# Altium PCB PCB1.PcbDoc
Units mil, origin at the board's own origin, x right, y up, seen from the top; angles counter-clockwise.
Board outline 6000 x 4000 mil, 2 copper layers (Top Layer, Bottom Layer); 18 components, 26 nets, 68 pads, 0 vias.
Unrouted connection lines stored in the file: 35.
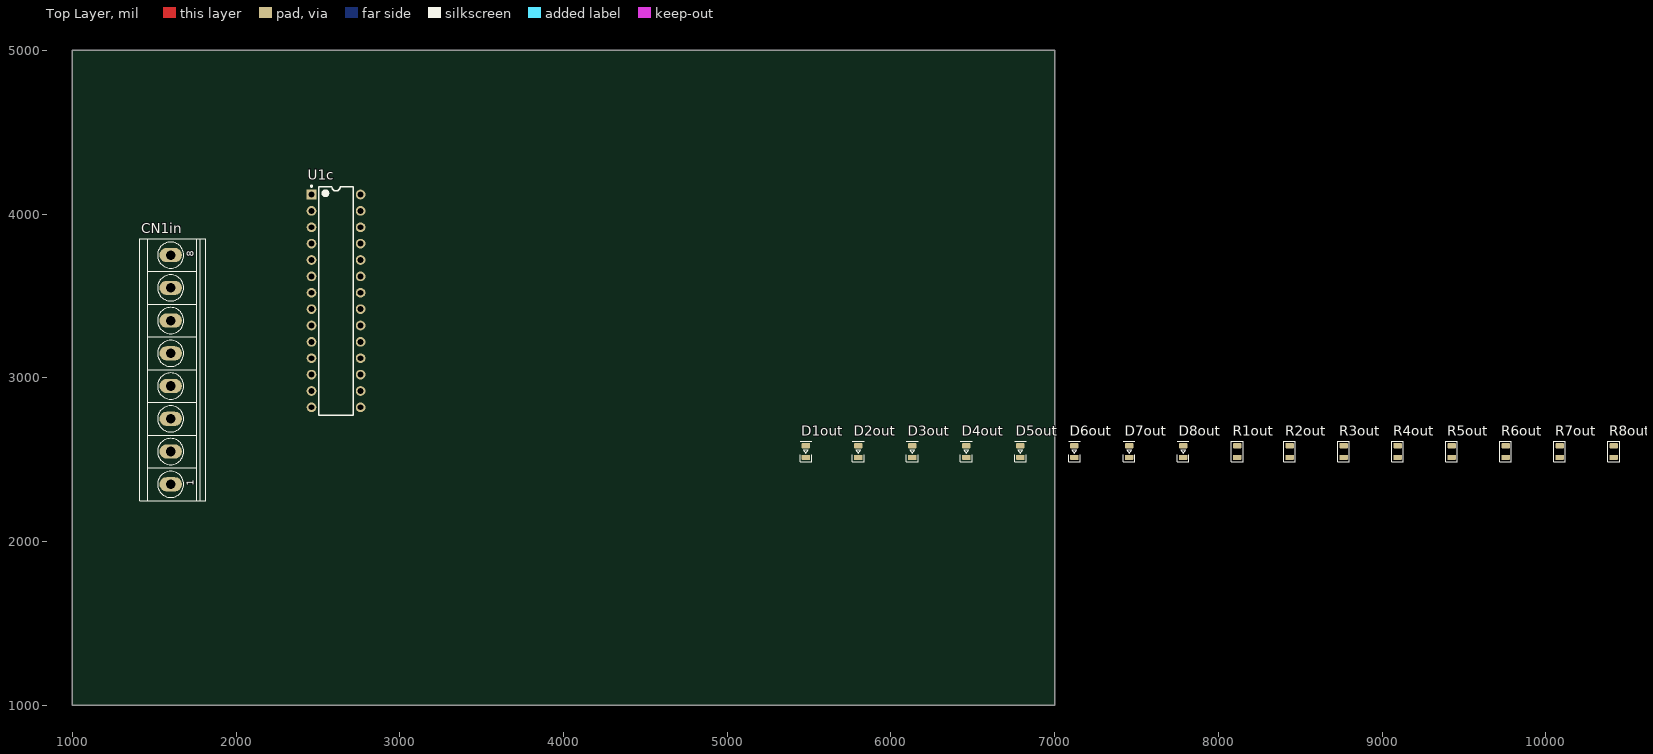
[diagram p0: Top Layer view]
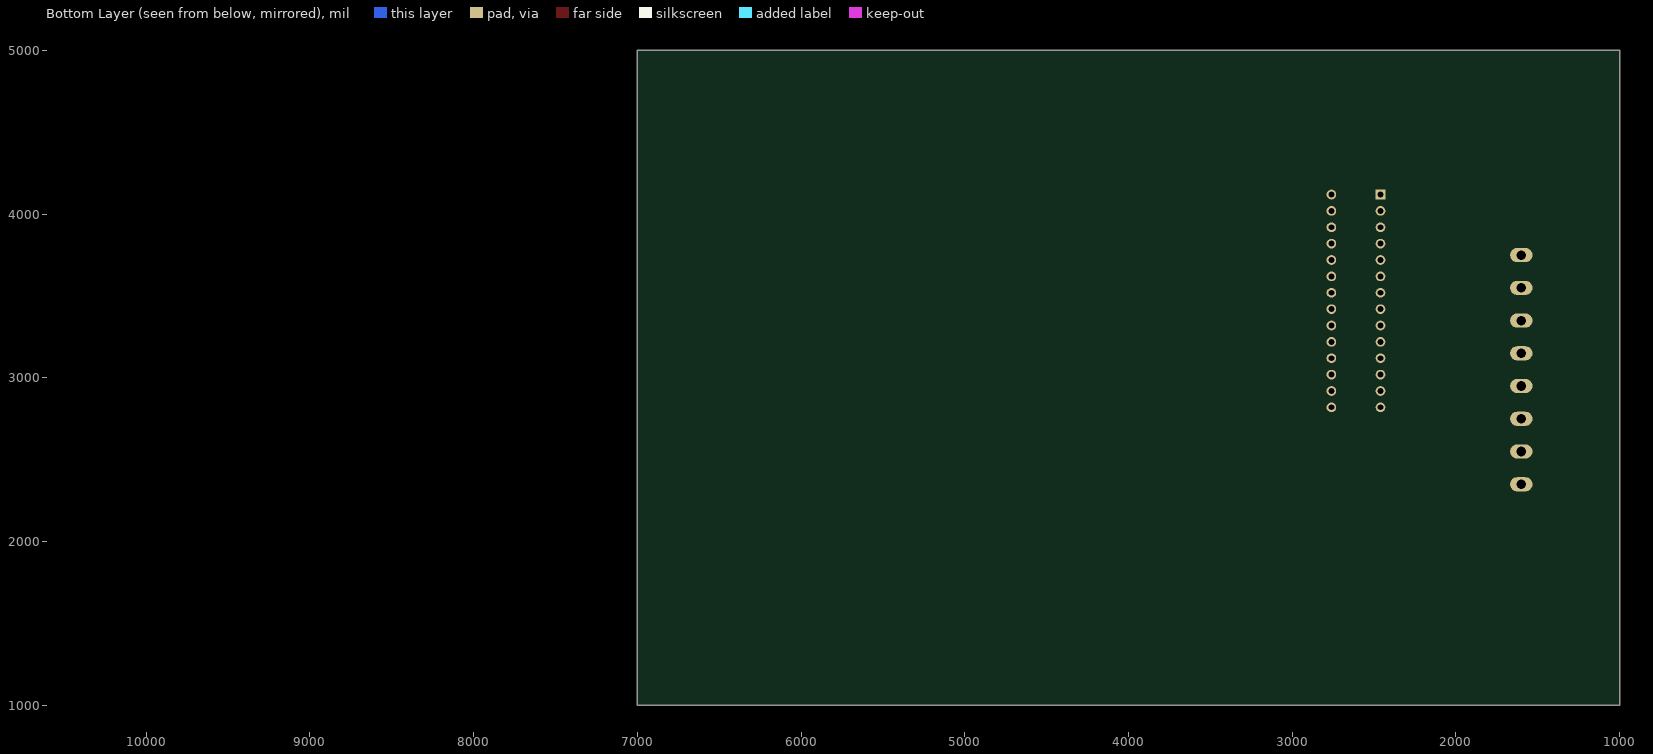
[diagram p1: Bottom Layer view, seen from below]

## Layer stack, top to bottom
Top Solder: solder mask 0.4, Solder Resist, Dk 3.5
Top Layer: signal copper 1.4
Dielectric 1: dielectric 12.6, FR-4, Dk 4.8
Bottom Layer: signal copper 1.4
Bottom Solder: solder mask 0.4, Solder Resist, Dk 3.5

## Board outline
1000,1000 7000,1000 7000,5000 1000,5000

## Design rules (kind name [scope] priority, off if disabled: settings)
Clearance [All] p1: gap=10 ignorepadtopadclearanceinfootprint=FALSE except(0: Arc-Hole Track-Hole SMDPad-Hole THPad-Hole Via-Hole Fill-Hole Poly-Hole Region-Hole Text-Hole)
PolygonConnect [All] p1: connectstyle=Relief reliefconductorwidth=10 reliefentries=4 polygonreliefangle="90 Angle" airgapwidth=10
RoomDefinition Leds [InComponentClass('Leds')] p1: confinementstyle=ConfineIn formatcopy=TRUE lockcomponents=FALSE outline 5435,845 10665,845 10665,2725 5435,2725
RoomDefinition Headers [InComponentClass('Headers')] p2: confinementstyle=ConfineIn formatcopy=TRUE lockcomponents=FALSE outline 975,2220 1825,2220 1825,4845 975,4845
RoomDefinition Avr [InComponentClass('Avr')] p3: confinementstyle=ConfineIn formatcopy=TRUE lockcomponents=FALSE outline 2420,2720 4555,2720 4555,4290 2420,4290
RoutingVias [All] p1: holewidth=28 width=50 viastyle="Through Hole" minholewidth=28 minwidth=50 maxholewidth=28 maxwidth=50
SolderMaskExpansion [All] p1: expansion=4 istentingtop=FALSE
Width [All] p1: maxlimit=10 minlimit=10 preferedwidth=10
30 further rules are at their usual default settings.

## Classes and differential pairs
component class Leds: D1out D2out D3out D4out D5out D6out D7out D8out R1out R2out R3out R4out R5out R6out R7out R8out
component class Headers: CN1in
component class Avr: U1c

## Components (designator, comment, footprint, x,y, rotation, side; value= is the part's Value field where it differs from the comment)
CN1in "TB08" TB508-08 1600,3050 r90 top
D1out "LED" LED-0805 5480,2550 r90 top
D2out "LED" LED-0805 5800,2550 r90 top
D3out "LED" LED-0805 6130,2550 r90 top
D4out "LED" LED-0805 6460,2550 r90 top
D5out "LED" LED-0805 6790,2550 r90 top
D6out "LED" LED-0805 7120,2550 r90 top
D7out "LED" LED-0805 7455,2550 r90 top
D8out "LED" LED-0805 7785,2550 r90 top
R1out "1k0" R0805 8115,2550 r90 top
R2out "1k0" R0805 8435,2550 r90 top
R3out "1k0" R0805 8765,2550 r90 top
R4out "1k0" R0805 9095,2550 r90 top
R5out "1k0" R0805 9425,2550 r90 top
R6out "1k0" R0805 9755,2550 r90 top
R7out "1k0" R0805 10085,2550 r90 top
R8out "1k0" R0805 10415,2550 r90 top
U1c "ATmega328-PU" 28P3 2610,3470 r0 top

## Footprints (in the part's own frame and the unit in brackets; to place one, negate y for a bottom-side part, rotate by r counter-clockwise, add the part's x,y. Pads: shape width x height; smd on the part's side, far side on the other; paste and mask are expansions set on the pad)
28P3 [mm] "28-Pin Plastic Dual In-Line Package (PDIP)"
  rect 1.5x1.5 hole 0.9: 1(-3.81,16.51)
  round 1.5 hole 0.9: 2(-3.81,13.97) 3(-3.81,11.43) 4(-3.81,8.89) 5(-3.81,6.35) 6(-3.81,3.81) 7(-3.81,1.27) 8(-3.81,-1.27) 9(-3.81,-3.81) 10(-3.81,-6.35) 11(-3.81,-8.89) 12(-3.81,-11.43) 13(-3.81,-13.97) 14(-3.81,-16.51) 15(3.81,-16.51) 16(3.81,-13.97) 17(3.81,-11.43) 18(3.81,-8.89) 19(3.81,-6.35) 20(3.81,-3.81) 21(3.81,-1.27) 22(3.81,1.27) 23(3.81,3.81) 24(3.81,6.35) 25(3.81,8.89) 26(3.81,11.43) 27(3.81,13.97) 28(3.81,16.51)
  silkscreen extent -3.93,-17.7 2.65,17.93, body extent -3.6,-17.65 3.6,17.65, height 4.58
LED-0805 [mm] "SMT LED DIODE 0805"
  rrect25% 0.8x1.3 smd: 1(-0.9,0) 2(0.9,0)
  silkscreen extent -1.6,-0.9 1.6,0.9, body extent -1.01,-0.62 1.01,0.63, height 1.1
R0805 [mm] "SMD RESISTOR 0805"
  rrect25% 0.8x1.3 smd: 1(-0.9,0) 2(0.9,0)
  silkscreen extent -1.6,-0.9 1.6,0.9, body extent -1,-0.62 1,0.63, height 0.45
TB508-08 [mm] "Vertical terminal block 0.2 inch (5.08mm) pitch"
  oval 2.2x3.5 hole 1.5: 1(-17.78,0) 2(-12.7,0) 3(-7.62,0) 4(-2.54,0) 5(2.54,0) 6(7.62,0) 7(12.7,0) 8(17.78,0)
  silkscreen extent -20.32,-5.4 20.32,4.8, body extent -20.86,-4.67 20.35,4.83, height 15.03

## Part data
CN1in: library part TB-08, "Terminal Block"
D1out D2out D3out D4out D5out D6out D7out D8out: "LED - Light-Emitting Diode"
R1out R2out R3out R4out R5out R6out R7out R8out: library part Resistor, "Single resistor", Power=0.125W, Unit price=0.1
U1c: library part CMP-0095-00015-2, "8-bit AVR Microcontroller, 32KB Flash, 1KB EEPROM, 2KB SRAM, 28-pin PDIP, Industrial Grade (-40°C to 85°C)", ComponentLink1Description="Manufacturer URL", ComponentLink1URL=http://www.atmel.com/, ComponentLink2Description="ATmega48A/48PA/88A/88PA/168A/168PA/328/328P Datasheet", ComponentLink2URL=http://www.atmel.com/dyn/resources/prod_documents/8271.pdf, ComponentLink3Description="ATmega48A/48PA/88A/88PA/168A/168PA/328/328P Summary", ComponentLink3URL=http://www.atmel.com/dyn/resources/prod_documents/8271S.pdf, DatasheetVersion="revD, May-2011", PackageDescription="28-lead (0.300\"/7.62mm Wide) Plastic Dual Inline Package (PDIP)", PackageReference=28P3, PackageVersion="revB, Sep-2001", RevisionNote="DatasheetVersion updated. URLs added."

## Nets (pads, with @x,y where several pads share a name; then routed paths per layer and width w, separated by ;. In a path a pad name is that pad's centre, name@x,y a point inside that pad or via, vN(x,y) a via of type N, cw(c..) or ccw(c..) an arc to the next point about the centre after c; other vN are vias at no path point)
GND: D1out.1 D2out.1 D3out.1 D4out.1 D5out.1 D6out.1 D7out.1 D8out.1 U1c.8 U1c.22
In0: CN1in.8 U1c.14
In1: CN1in.7 U1c.15
In2: CN1in.6 U1c.16
In3: CN1in.5 U1c.17
In4: CN1in.4 U1c.18
In5: CN1in.3 U1c.19
In6: CN1in.2 U1c.9
In7: CN1in.1 U1c.10
NetD1out_2: D1out.2 R1out.1
NetD2out_2: D2out.2 R2out.1
NetD3out_2: D3out.2 R3out.1
NetD4out_2: D4out.2 R4out.1
NetD5out_2: D5out.2 R5out.1
NetD6out_2: D6out.2 R6out.1
NetD7out_2: D7out.2 R7out.1
NetD8out_2: D8out.2 R8out.1
Out0: R8out.2 U1c.2
Out1: R7out.2 U1c.3
Out2: R6out.2 U1c.4
Out3: R5out.2 U1c.5
Out4: R4out.2 U1c.6
Out5: R3out.2 U1c.11
Out6: R2out.2 U1c.12
Out7: R1out.2 U1c.13
VCC: U1c.7 U1c.20 U1c.21
pads on no net: U1c.1 U1c.23 U1c.24 U1c.25 U1c.26 U1c.27 U1c.28

## Text inside footprints (layer, text, board x,y; h text height)
CN1in: Top Overlay "8" at 1740,3740 h43.31 r90; Top Overlay "1" at 1740,2340 h43.31 r90